# Altium PCB PCB1-B-EVT2.PcbDoc (part 4 of 5)
Units mil, origin at the board's own origin, x right, y up, seen from the top; angles counter-clockwise.
Board outline 3000.03 x 3779.56 mil, 2 copper layers (Top Layer, Bottom Layer); 115 components, 91 nets, 486 pads, 285 vias.
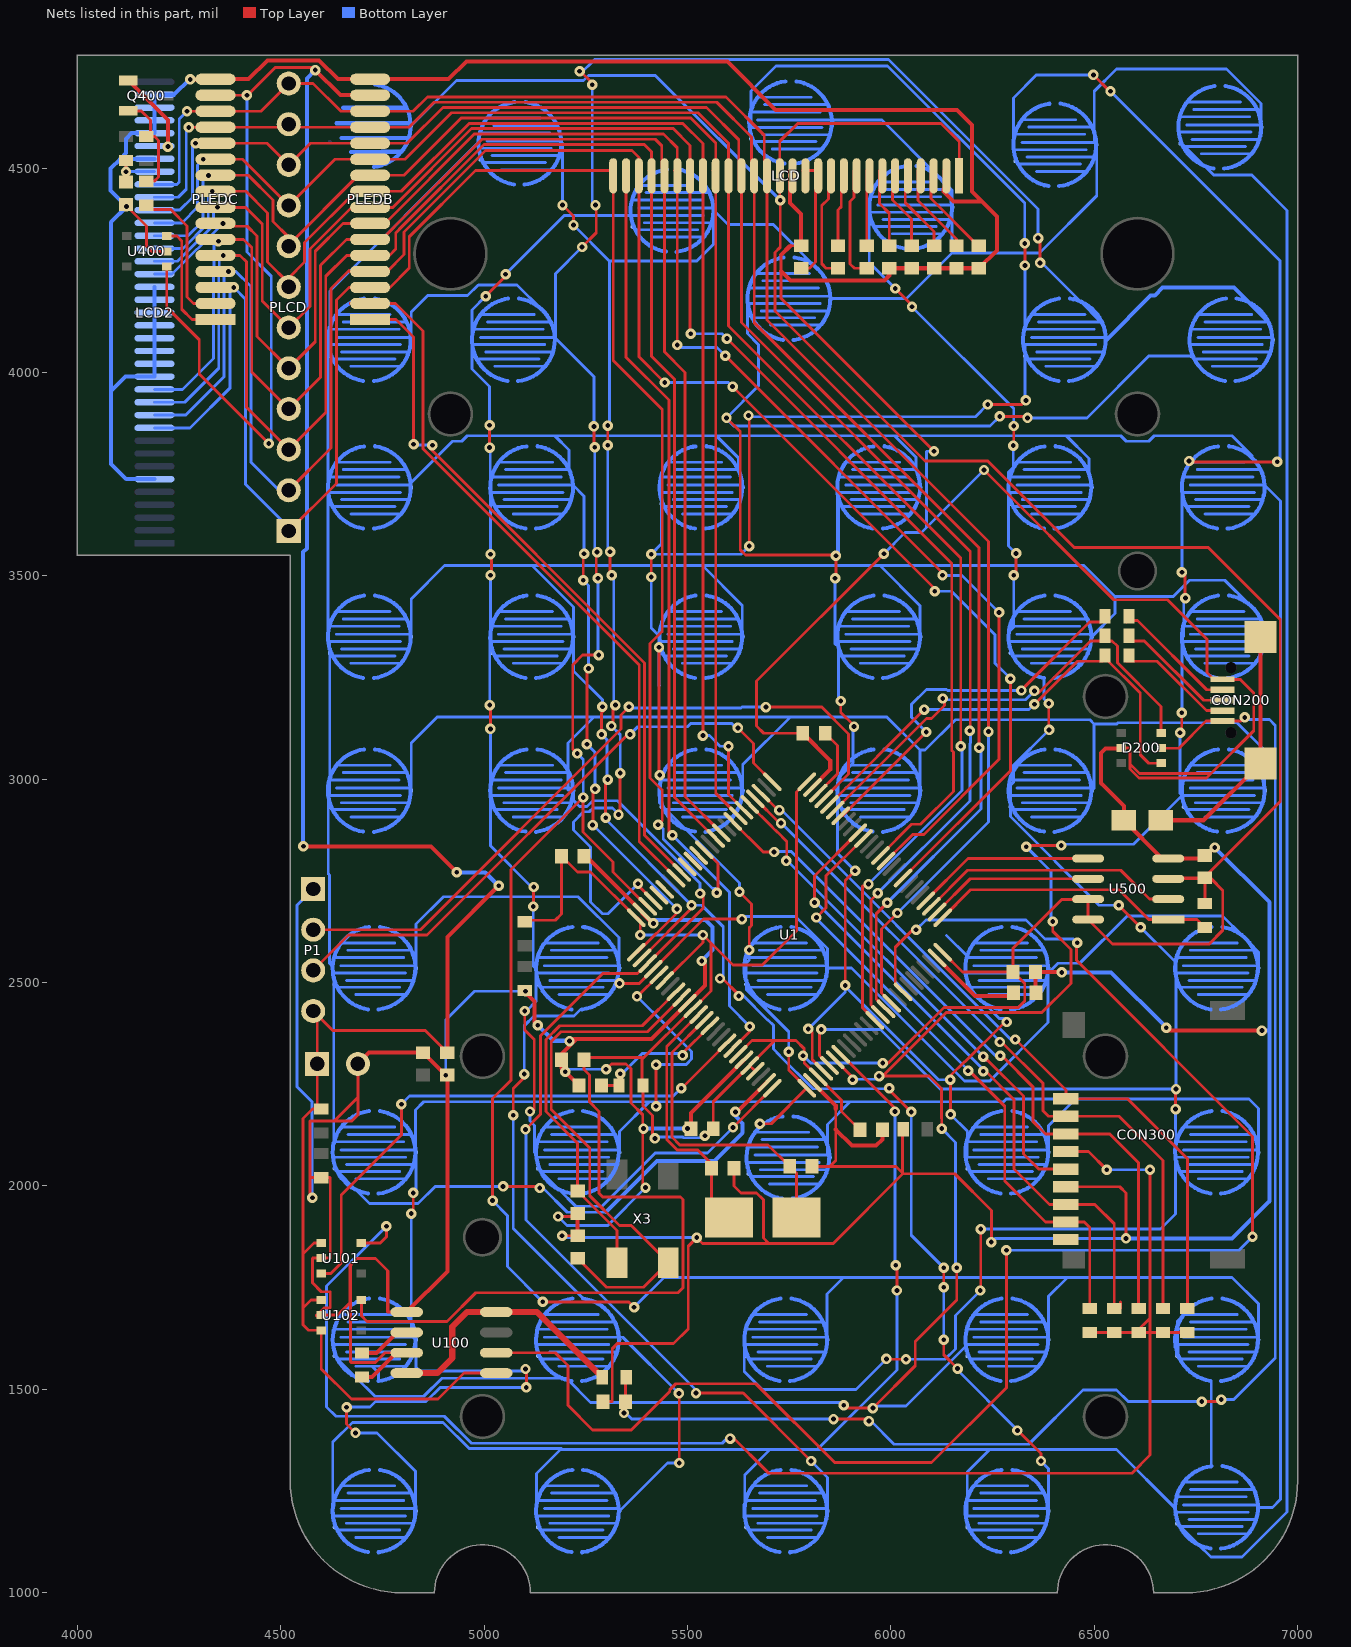
[diagram p4: the nets of this part, all layers, seen from the top]

## Via types
v1: diameter 25.59, hole 11.81, Top Layer to Bottom Layer, 281 vias
v2: diameter 25.59, hole 11.81, Top Layer to Bottom Layer, tented both sides, 2 vias
v3: diameter 39.37, hole 39.37, Top Layer to Bottom Layer, tented both sides, 2 vias

## Nets (pads, with @x,y where several pads share a name; then routed paths per layer and width w, separated by ;. In a path a pad name is that pad's centre, name@x,y a point inside that pad or via, vN(x,y) a via of type N, cw(c..) or ccw(c..) an arc to the next point about the centre after c; other vN are vias at no path point) (continued)
FSMC_A16: LCD2.11 LCD.26 PLCD.2 PLEDB.4 PLEDC.4 U1.58 | length 4991.1
  Top Layer w7: PLCD.2@4520,3710 4624.03,3814.03 4624.03,4206.03 4668,4250 4669.89,4248.11 PLEDB.4@4720,4248.11 4762.11,4248.11 4803.29,4289.29 4803.29,4344.38 4804.71,4345.81 4804.71,4346.33 5003.38,4545 5364,4545 5380.6,4528.4 LCD.26@5380.6,4483 5380.6,4038.4 v1(5444,3975) ; LCD.26@5374.01,4449.61 LCD.26@5374.01,4496.06 ; v1(5611,3965) 6111,3465 v1(6108,3462) ; U1.58@6030.09,2756.89 6294,3020.8 v1(6294,3247)
  Bottom Layer w7: LCD2.11@4190,3894.96 4266.96,3894.96 4361,3989 v1@4361,4245 ; v1(4372,4248.11) 4389.89,4248.11 4427,4211 4427,3779 4496,3710 PLCD.2@4520,3710 ; v1(5444,3975) 5601,3975 v1(5611,3965) ; v1(6108,3462) 6149,3462 6256,3355 6256,3285 v1(6294,3247)
FSMC_D0: LCD2.22 LCD.23 PLCD.5 PLEDB.7 PLEDC.7 U1.61 | length 4329.5
  Top Layer w7: v1(4358,4366) 4357.78,4366.22 PLEDC.7@4340,4366.22 4347.22,4359 4417.97,4359 4441.97,4335 4441.97,4088.03 PLCD.5@4520,4010 4585.03,4075.03 4585.03,4297.82 4653.42,4366.22 PLEDB.7@4720,4366.22 4756.22,4366.22 4976,4586 5441,4586 5475.09,4551.91 5475.09,4502.65 LCD.23@5468.5,4496.06 ; v1(5475.09,4067.09) LCD.23@5475.09,4483 ; v1(5593,4041) v1@6127,3507 ; U1.61@5988.33,2798.65 6054,2864.32 6081.32,2864.32 6266,3049 v1(6266,3410) ; v1(6127,3501) 6127,3500 v1@6129,3498
  Bottom Layer w7: LCD2.22@4190,4241.42 4233.42,4241.42 v1(4358,4366) ; v1(5475.09,4067.09) 5481.17,4061 5573,4061 v1(5593,4041) ; v1(6127,3501) 6175,3501 v1(6266,3410)
FSMC_D1: LCD2.23 LCD.22 PLCD.6 PLEDB.8 PLEDC.8 U1.62 | length 4073.4
  Top Layer w7: v1(4345,4406) 4340.41,4406 PLEDC.8@4340,4405.59 4414.38,4405.59 4454.97,4365 4454.97,4175.03 PLCD.6@4520,4110 4572.03,4162.03 4572.03,4303.21 4674.41,4405.59 PLEDB.8@4720,4405.59 4775.59,4405.59 4969,4599 5465,4599 5506.58,4557.42 5506.58,4502.65 LCD.22@5500,4496.06 ; LCD.22@5506.58,4483 5506.58,4096.42 v1(5508,4095) ; v1(5597,4083) 6149.7,3530.3 6149.7,3070.47 6153.81,3066.37 6153.81,2969.81 6073,2889 6050.84,2889 U1.62@5974.41,2812.57
  Bottom Layer w7: LCD2.23@4190,4272.91 4246.53,4272.91 4335,4361.38 4335,4396 v1(4345,4406) ; v1(5508,4095) 5585,4095 v1(5597,4083)
FSMC_D2: LCD2.24 LCD.21 PLCD.7 PLEDB.9 PLEDC.9 U1.81 | length 3530.6
  Top Layer w7: v1(4332,4445) v1(4332,4445) PLEDC.9@4340,4444.96 4415.04,4444.96 4467.97,4392.03 4467.97,4270.97 PLCD.7@4520,4218.94 ; PLCD.7@4520,4210 PLCD.7@4520,4218.94 ; LCD.21@5531.5,4496.06 5538.08,4502.65 5538.08,4562.54 5488.62,4612 4963.62,4612 4796.58,4444.96 PLEDB.9@4720,4444.96 4685.04,4444.96 4559.03,4318.95 4559.03,4270.97 4520,4231.94 PLCD.7@4520,4218.94 ; v1(5538,3107) LCD.21@5538.08,4483 ; v1(5601,3081) 5601,2961.87 U1.81@5638.95,2923.92
  Bottom Layer w7: LCD2.24@4190,4304.41 4259.64,4304.41 4322,4366.77 4322,4435 v1(4332,4445) ; v1(5538,3107) 5554.16,3107 5580.16,3081 v1(5601,3081)
FSMC_D3: LCD2.25 LCD.20 PLCD.8 PLEDB.10 PLEDC.10 U1.82 | length 3435
  Top Layer w7: v1(4323,4484) 4323.33,4484.33 PLEDC.10@4340,4484.33 4420.33,4484.33 4480.97,4423.69 4480.97,4370.97 4520,4331.94 PLCD.8@4520,4313.32 ; PLCD.8@4520,4310 PLCD.8@4520,4313.32 ; LCD.20@5562.99,4496.06 5569.57,4502.65 5569.57,4563.43 5508,4625 4944,4625 4803.33,4484.33 PLEDB.10@4720,4484.33 4691.01,4484.33 PLCD.8@4520,4313.32 ; LCD.20@5569.57,4483 5569.57,2965.46 U1.82@5625.03,2910
  Bottom Layer w7: LCD2.25@4190,4335.91 4272.75,4335.91 4309,4372.15 4309,4470 v1(4323,4484)
FSMC_D4: LCD2.26 LCD.19 PLCD.9 PLEDB.11 PLEDC.11 U1.38 | length 4222.7
  Top Layer w7: v1(4310,4524) 4310.3,4523.7 PLEDC.11@4340,4523.7 4406.3,4523.7 PLCD.9@4520,4410 4633.7,4523.7 PLEDB.11@4720,4523.7 4805.7,4523.7 4920,4638 5526,4638 5601.07,4562.93 LCD.19@5601.07,4483 5601.07,4113.93 6171.7,3543.3 6171.7,3109.77 6172,3109.47 v1(6172,3081) ; v1(5945,2742) 5940,2737 5930,2737 5930,2438 U1.38@5960.49,2407.51
  Bottom Layer w7: LCD2.26@4190,4367.4 4257.4,4367.4 4296,4406 4296,4510 v1(4310,4524) ; v1(5945,2742) 6175,2972 6175,3078 v1(6172,3081)
FSMC_D5: LCD2.27 LCD.18 PLCD.10 PLEDB.12 PLEDC.12 U1.39 | length 4222.7
  Top Layer w7: v1(4291,4563) 4291.07,4563.07 PLEDC.12@4340,4563.07 4466.93,4563.07 PLCD.10@4520,4510 4573.07,4563.07 PLEDB.12@4720,4563.07 4811.07,4563.07 4899,4651 5546.5,4651 5625.98,4571.52 LCD.18@5625.98,4451 ; LCD.18@5632.57,4483 5632.57,4122.43 6195,3560 6195,3120 v1(6194,3119) ; v1(5968,2720) 5951,2703 5951,2444.84 U1.39@5974.41,2421.43
  Bottom Layer w7: LCD2.27@4190,4398.9 4251.9,4398.9 4283,4430 4283,4563 v1(4291,4563) ; v1(5968,2720) 6194.7,2946.7 6194.7,3087.53 6196,3088.83 6196,3117 v1(6194,3119)
FSMC_D6: LCD2.28 LCD.17 PLCD.11 PLEDB.13 PLEDC.13 U1.40 | length 4173.1
  Top Layer w7: v1(4274,4602) 4274.44,4602.44 PLEDC.13@4340,4602.44 4512.44,4602.44 PLCD.11@4520,4610 4527.56,4602.44 PLEDB.13@4720,4602.44 4815.44,4602.44 4877,4664 5572,4664 5657.48,4578.52 LCD.17@5657.48,4496.06 ; LCD.17@5664.06,4483 5664.06,4121.94 6217,3569 v1(6217,3077) ; U1.40@5988.33,2435.35 5964,2459.68 5964,2669 v1(5991,2696)
  Bottom Layer w7: LCD2.28@4190,4430.39 4248.39,4430.39 4268,4450 4268,4602 v1(4274,4602) ; v1(5991,2696) 6222,2927 6222,3072 v1(6217,3077)
FSMC_D7: LCD2.29 LCD.16 PLCD.12 PLEDB.14 PLEDC.14 U1.41 | length 4239.8
  Top Layer w7: v1(4269.81,4641.81) PLEDC.14@4340,4641.81 4451.81,4641.81 PLCD.12@4520,4710 4580,4710 4648.19,4641.81 PLEDB.14@4720,4641.81 4825.81,4641.81 4861,4677 5594.9,4677 5688.98,4582.92 LCD.16@5688.98,4496.06 ; LCD.16@5695.56,4483 5695.56,4128.44 6240,3584 v1(6240,3117) ; U1.41@6002.25,2449.27 5977,2474.52 5977,2632 v1(6016,2671)
  Bottom Layer w7: LCD2.29@4190,4461.89 4244.89,4461.89 4251,4468 4251,4623 v1(4269.81,4641.81) ; v1(6016,2671) 6240,2895 v1(6240,3117)
FSMC_NE1: LCD2.10 LCD.28 PLCD.1 PLEDB.3 PLEDC.3 U1.88 | length 4658.9
  Top Layer w7: PLCD.1@4520,3610 4637.03,3727.03 4637.03,4177.99 4667.77,4208.74 PLEDB.3@4720,4208.74 4768.74,4208.74 4816.29,4256.29 4816.29,4333.19 4979.16,4496.06 5311.02,4496.06 LCD.28@5311.02,4463 ; LCD.28@5317.6,4483 5317.6,4029.4 5438,3909 5438,3363 5437.47,3363 5407.7,3333.24 5407.7,3002.77 5437.47,2973 5438,2973 5438,2898 v1(5428,2888) ; U1.88@5541.51,2826.49 5575,2793 5575,2721 v1(5572,2721)
  Bottom Layer w7: LCD2.10@4190,3863.46 4277.46,3863.46 4376,3962 v1@4376,4209 ; v1(4385,4208.74) 4414,4179.74 4414,3724.94 4520,3618.94 PLCD.1@4520,3610 ; v1(5428,2888) 5429,2889 5440.7,2877.3 5440.7,2852.77 5561.85,2731.62 5569.38,2731.62 5572,2729 v1(5572,2721)
FSMC_NOE: LCD2.13 LCD.24 PLCD.4 PLEDB.6 PLEDC.6 U1.85 | length 4116.8
  Top Layer w7: PLEDC.6@4340,4326.85 4409.12,4326.85 4428.97,4307 4428.97,4001.03 PLCD.4@4520,3910 4598.03,3988.03 4598.03,4263.03 4661.85,4326.85 PLEDB.6@4720,4326.85 4748.99,4326.85 4770,4347.86 4778.71,4356.58 4778.71,4357.1 4994.62,4573 5421,4573 5437.01,4556.99 LCD.24@5437.01,4496.06 ; LCD.24@5443.59,4483 5443.59,4050.41 5494,4000 5494,2957.52 U1.85@5583.27,2868.25
  Bottom Layer w7: LCD2.13@4190,3957.95 4258.95,3957.95 4335,4034 4335,4255.77 4336,4256.77 4336,4320.05 4364.74,4320.05
  other v1: 4347,4322
FSMC_NWE: LCD2.12 LCD.25 PLCD.3 PLEDB.5 PLEDC.5 U1.86 | length 4235.8
  Top Layer w7: PLEDC.5@4340,4287.48 v1(4359,4287.48) 4400.49,4287.48 4415.97,4272 4415.97,3914.03 PLCD.3@4520,3810 4611.03,3901.03 4611.03,4235.99 4662.52,4287.48 PLEDB.5@4720,4287.48 4767.48,4287.48 4783,4303 4783,4342.48 4791.71,4351.19 4791.71,4351.71 5000,4560 5394,4560 5412.09,4541.91 5412.09,4502.65 LCD.25@5405.51,4496.06 ; PLEDB.5@4740.26,4293.25 PLEDB.5@4741.71,4293.25 ; LCD.25@5412.09,4483 5412.09,4038.91 5468,3983 5468,2955.68 U1.86@5569.35,2854.33
  Bottom Layer w7: LCD2.12@4190,3926.46 4264.46,3926.46 4348,4010 4348,4250.38 4349,4251.38 4349,4277.48 v1(4359,4287.48)
GND: BAT.2 C8.2 C9.2 C10.2 C11.2 C12.2 C13.2 C14.1 C15.2 C16.2 C17.2 C18.2 C19.2 C100.1 C101.1 C102.1 C400.1 C401.1 C402.1 C403.1 C404.1 C407.1 C410.1 C500.2 CON200.5 CON300.6 D200.2 L200.2 LCD2.6 LCD2.14 LCD2.15 LCD2.16 LCD2.17 LCD2.18 LCD2.19 LCD2.20 LCD2.21 LCD2.31 LCD2.33 LCD2.34 LCD2.35 LCD2.36 LCD.2 LCD.14 P1.1 PLEDB.16 PLEDC.16 R7.1 R12.2 R103.1 R104.1 U1.10 U1.20 U1.27 U1.74 U1.99 U100.1 U100.3 U101.2 U102.2 U400.2 U500.4 | length 21699.5
  Top Layer w7: C410.1@4120,4412.44 4120,4410 4170,4360 4170,4310 4182.6,4297.4 U400.2@4220,4297.4 ; v1(4578,1971) 4572,1977 4572,2021.47 ; U102.2@4589,1682 4607,1700 4621,1700 4622,1701 4622,1739 4621,1740 4600,1740 4578,1762 4578,1821.6 4579,1822.6 U101.2@4600,1822.6 4621,1822.6 4622,1823.6 4622,2019.47 4621,2020.47 R104.1@4600,2020.47 4573,2020.47 4572,2021.47 ; U102.2@4600,1682.6 4640.1,1682.6 4670,1712.5 4670,1804.5 4687.5,1822 4733,1822 4762.5,1792.5 ; 4673,1805 4672,1804 4672,1567 4673,1566 4732.51,1566 4756.51,1590 4784,1590 U100.3@4810,1590 ; BAT.2@4690,2300 4690,2218 ; U100.1@4810,1690 4765,1690 ; R7.1@5100,2480.47 v1(5102,2478.47) ; v1(5182,1925) 5212.56,1925 C17.2@5230,1942.44 ; v1(5192,1877.56) C18.2@5230,1877.56 ; C100.1@5292.44,1470 5314,1470 5315,1471 5315,1600 5327.5,1612.5 5466,1612.5 5502,1648.5 5502,1852 v1(5523,1873) 5537,1859 5700,1859 ; v1(5300,2287) 5313,2300 5349,2300 5361,2288 5361,2204 5390,2175 5390,2003 v1(5397,1996) ; C15.2@5614.56,2044 5614.56,2000 5631.56,1983 5670,1983 5687,1966 5687,1872 5700,1859 ; LCD.14@5751.97,4496.06 5758.55,4496.06 LCD.14@5758.55,4483 ; C407.1@5779.53,4311.02 5753,4311.02 5750,4311.02 5730,4291.02 5730,4288.02 5730,4249 5730,4182 v1(6106,3806) ; C13.2@5783.44,3113 5687.5,3113 5670,3130.5 5670,3241 v1(5983,3554) ; C16.2@5806.56,2048 5850,2048 ; 5864.5,2189.83 5864.5,2138.5 5864.5,2062.5 5850,2048 ; R12.2@6029.47,2138 6029,2137.53 6029,2031.5 ; LCD.2@6129.92,4496.06 6129.92,4450 6136.5,4450 LCD.2@6136.5,4483 ; v1(6229,3760) 6548,3441 6680,3441 6777,3344 6777,3262.5 6794.5,3245 6859,3245 6860,3244 ; v1(6247,1862) 6247,1940 6157,2030 6030.5,2030 6029,2031.5 ; CON300.6@6430.18,1998.05 6562.5,1998.05 6578,1982.55 v1(6578,1871) ; D200.2@6555.4,3075 6557.4,3077 6564,3077 6564,3076.6 D200.2@6566,3076.6 6587,3076.6 6588,3075.6 6588,3037.5 ; CON200.5@6814.68,3245.18 6859,3245.18 6860,3244.18 6860,3244 ; 4572,2021.47 4572,2158 ; 4572,2158 4572,2159 4573,2160 4632,2160 ; 4572,2158 4573,2159 4631,2159 4632,2160 ; 4632,2160 4675,2160 4690,2175 4690,2218 ; 4632,2160 4690,2218 ; 4762.5,1792.5 4762.5,1690 4765,1690 ; 4762.5,1792.5 4764,1791 4764,1691 4765,1690 ; 5700,1859 5858.5,1859 6029,2029.5 6029,2031.5 ; 5850,2048 6012.5,2048 6029,2031.5 ; 6588,3037.5 6611.5,3014 6787,3014 ; 6588,3037.5 6588,3025 6610,3003 6776,3003 6787,3014 ; 6787,3014 6892,3119 6892,3212 6860,3244
  Top Layer w10: v1(4278,4720) 4339.45,4720 PLEDC.16@4340,4720.55 4421.55,4720.55 4467.8,4766.8 4594.86,4766.8 4641.1,4720.55 PLEDB.16@4720,4720.55 4913,4720.55 4956.45,4764 5598,4764 5717,4645 6162.5,4645 6200,4607.5 6200,4444 6224,4420 ; U102.2@4589,1682 4596.9,1682 U102.2@4600,1682.6 ; BAT.2@4690,2300 4717.56,2327.56 C102.1@4850,2327.56 4905.12,2272.44 C101.1@4910,2272.44 4910,1790 U100.1@4810,1690 ; R103.1@4700,1530.47 4724.47,1530.47 U100.3@4784,1590 ; R7.1@5100,2480.47 5100,2477.59 5123.8,2453.8 5123.8,2403.2 v1(5132,2395) ; v1(5210,2356) 5215,2361 5227,2361 ; C18.2@5230,1877.56 C17.2@5230,1932.44 C17.2@5230,1942.44 ; C14.1@5233.44,2247 v1(5199.72,2280.72) 5190.44,2290 C19.2@5190.44,2310 5190.44,2324.44 5227,2361 ; C10.2@5245.56,2811 5250.77,2811 U1.99@5388.4,2673.37 5388.4,2671.57 5414.48,2645.48 v1(5416.29,2645.48) ; v1(5500,2141) C11.2@5508.44,2141 5508.44,2179.57 U1.20@5638.95,2310.08 ; v1(5535,2553) 5543.2,2544.8 5543.2,2492.72 U1.10@5499.75,2449.27 5411.48,2361 5227,2361 ; 5730,4249 5753,4226 5984.56,4226 5996.06,4237.5 C404.1@5996.06,4255.91 C403.1@6051.18,4255.91 C402.1@6106.3,4255.91 C401.1@6161.42,4255.91 C400.1@6216.54,4255.91 6260.63,4300 6260.63,4383.37 6224,4420 ; 5730,4288.02 5753,4311.02 ; LCD.14@5751.97,4496.06 5751.97,4416.56 5779.53,4389 C407.1@5779.53,4311.02 ; C13.2@5783.44,3113 5851,3045.44 5851,3023.23 U1.74@5807.37,2979.6 ; U1.27@5807.37,2254.4 5807.6,2254.4 5864.5,2197.5 5864.5,2189.83 ; 5864.5,2138.5 5904,2099 5964,2099 5979.56,2114.56 C8.2@5979.56,2138 ; R12.2@6029.47,2138 R12.2@6030.47,2139 ; LCD.2@6129.92,4450 6129.92,4444 6153.92,4420 6224,4420 ; C12.2@6355.56,2467 C9.2@6355.56,2526 6421,2526 v1(6420,2525) ; D200.2@6555.4,3075 6528,3075 6517,3064 6517,2990 6573,2934 L200.2@6573,2899 6667,2805 U500.4@6681.85,2805 6764.29,2805 C500.2@6771.85,2812.56 6776.56,2812.56 v1(6796,2832) ; v1(6677,2389) 6684,2382 v1(6912,2382)
  Bottom Layer w7: v1(4578,1971) 4577,1972 4577,2207 4540,2244 4540,2690 P1.1@4580,2730 ; v1(4906,2272) 4906,2408 4976.47,2478.47 v1(5102,2478.47) ; v1(5182,1925) 5204,1903 5304,1903 v1(5397,1996) ; v1(5192,1877.56) 5196.56,1873 v1(5523,1873) ; v1@5198.5,2279.5 v1(5199.72,2280.72) 5206,2287 v1(5300,2287) ; v1(5983,3554) 6035,3606 6075,3606 6088,3619 ; v1(6106,3806) 6089,3806 6088,3805 6088,3619 ; v1(6229,3760) 6088,3619 ; v1(6247,1862) 6256,1871 v1(6578,1871)
  Bottom Layer w10: LCD2.6@4190,3737.48 4120.52,3737.48 4083,3775 4083,3954 ; LCD2.21@4190,4209.92 LCD2.20@4190,4178.43 LCD2.19@4190,4146.93 LCD2.18@4190,4115.43 LCD2.17@4190,4083.94 LCD2.16@4190,4052.44 LCD2.15@4190,4020.95 LCD2.14@4190,3989.45 4118.45,3989.45 4083,3954 ; LCD2.31@4190,4524.88 4105.88,4524.88 ; v1(4278,4720) 4277,4721 4238.36,4682.36 LCD2.36@4190,4682.36 LCD2.35@4190,4650.87 LCD2.34@4190,4619.37 LCD2.33@4190,4587.88 4133.88,4587.88 4120,4574 4120,4539 4105.88,4524.88 ; v1(5132,2395) 5133,2395 5171,2357 5209,2357 v1(5210,2356) ; v1(5392,2141) v1(5500,2141) ; v1(5416.29,2645.48) 5415.52,2645.48 5407,2654 5544,2654 5561.8,2636.2 5561.8,2579.8 v1(5535,2553) ; v1(6420,2525) 6541,2525 v1(6677,2389) ; v1(6578,1871) 6839,1871 6930.5,1962.5 6930.5,2381 ; v1(6796,2832) 6930.5,2697.5 6930.5,2381 ; v1(6912,2382) 6929.5,2382 6930.5,2381 ; 4083,3954 4083,4369 4121,4407 v1(4121,4408) 4082,4447 4082,4501 4105.88,4524.88
I2C1_SCL: U1.95
I2C1_SDA: U1.96
KI_0: KEY1.2 KEY8.2 KEY15.2 KEY22.2 KEY29.2 KEY36.2 KEY43.2 U1.24 | length 4067.3
  Top Layer w7: v1(5047,1999) 5137,1999 5139,1997 v1(5137,1995)
  Top Layer w10: v1(5618,2182) 5619.23,2180.77 5621,2180.77 U1.24@5694.63,2254.4
  Bottom Layer w7: 4616.57,4087.01 4616.57,4072.25 4616.57,3724.48 4616.57,3709.25 4616.57,3357.48 4616.57,3342.25 4620.81,3338 4620.81,3319.81 4620.81,3310 4620.81,3001.92 4620.81,2963.32 4617.03,2959.54 4617.03,2932 4617.03,2767.58 4620.53,2764.08 4620.53,2546.53 4628.06,2539 ; 4616.54,4087.04 4621,4091.5 4621,4110.53 4621,4200.09 4986.34,4565.43 4986.49,4565.58 4986.49,4568.97 ; 4630.53,2105.21 4630.53,2495.4 4630.53,2512.62 ; KEY43.2@4632.51,2043.89 4633.2,2043.2 4633.7,2042.7 KEY43.2@4632.7,2042.7 4639.03,2036.37 4683.96,1991.44 4718.4,1957 4838,1957 4880,1999 v1(5047,1999) ; 5008.02,4624.99 5139.02,4624.99 ; v1(5137,1995) 5145.05,1995 5204.55,1935.5 5299.5,1935.5
  Bottom Layer w10: 5299.5,1935.5 5425,2061 5566,2061 5635.8,2130.8 5635.8,2153.86 5618,2171.65 v1(5618,2182) v1@5616.35,2182
KI_1: KEY2.2 KEY9.2 KEY16.2 KEY23.2 KEY30.2 KEY37.2 KEY44.2 U1.25 | length 3384
  Top Layer w7: v1(5004,4187) 5053,4236 v1(5053,4241) ; v1(5013.82,3815) v1(5013.82,3869.82) ; v1(5014,3182) 5015.57,3180.43 v1(5015.57,3123.57) ; v1(5016,3501) 5018,3501 5018,3553 v1(5016,3553) ; v1(5100,2430) 5100,2383.53 5123.3,2360.24 5123.3,2187.3 5119,2183 v1(5113,2183) ; v1(5121,2687) 5122,2688 v1(5122,2735) ; v1(5612,2144) 5612.07,2144 U1.25@5708.55,2240.48
  Bottom Layer w7: v1(5004,4187) 4970.6,4153.6 4970.6,4082.75 4970.6,4076.98 4970.6,4040 4970.6,4008.4 5013.82,3965.18 v1(5013.82,3869.82) ; v1(5013.82,3815) 5015.41,3816.59 5015.41,3815 5015.41,3721.88 ; v1(5014,3182) 5014,3310 5014,3359.91 5016,3361.91 v1(5016,3501) ; 5015.57,2964.24 5015.57,2932 5015.57,2836.43 5117,2735 v1(5122,2735) ; 5015.57,2979.49 v1(5015.57,3123.57) ; v1(5016,3553) 5016,3677 5016,3704.82 ; KEY16.2@5019.81,3678.19 5020.5,3677.5 5021,3677 KEY16.2@5020,3677 ; v1(5053,4241) 5197.18,4385.18 5361.07,4385.18 ; v1(5100,2430) 5104,2430 5128,2454 5128,2495.4 5128,2533.67 5121,2540.67 v1(5121,2687) ; v1(5113,2183) 5113,2159.53 5124.3,2148.24 5124.3,2082.72 5128.05,2078.97 ; KEY44.2@5132.7,2042.7 5139.03,2036.37 5183.96,1991.44 5225.4,1950 5290,1950 5421,2081 5549,2081 v1(5612,2144)
KI_2: KEY3.2 KEY10.2 KEY17.2 KEY24.2 KEY31.2 KEY38.2 KEY45.2 U1.26 | length 4537.2
  Top Layer w7: v1(5411,3497) v1(5411,3553) ; v1(5430,3324) 5430,3012 v1(5432,3010) ; v1(5628,2723) 5657.8,2693.2 5657.8,2640.35 5652,2634.55 v1(5652,2580) ; v1(5650,3894) 5652,3896 v1(5652,3573) ; v1(5678,2153) 5705.97,2153 U1.26@5793.45,2240.48 5749,2284.93 v1(5749,2330) ; v1(6238,3921) 6322,3921 v1(6332,3931) ; v1(6329,4317) 6329.61,4316.39 v1(6329.61,4262.61)
  Bottom Layer w7: v1(5411,3497) 5411,3371.25 5431.29,3350.95 5431.29,3348.72 5431.29,3310 KEY24.2@5436,3310 ; v1(5430,3324) 5430,3229 5431.29,3230.29 ; 5431.31,2974 5431.31,2969.73 5431.31,2941.06 5438.69,2933.68 5447.37,2925 5495.27,2877.11 5628,2744.37 v1(5628,2723) ; 5435.81,3705 5435.81,3686.81 5435.81,3577.81 v1(5411,3553) 5632,3553 v1(5652,3573) ; v1(5650,3894) 5647,3891 6208,3891 v1(6238,3921) ; v1(5652,2580) 5652,2561.4 5652,2555.53 5644.5,2548.03 5644.5,2523.4 5644.5,2504.59 KEY38.2@5644.5,2495.4 5644.5,2483.5 5749,2379 v1(5749,2330) ; 5656.19,4602.17 5656.19,4644.09 5656.19,4691.19 5718,4753 5992,4753 6329,4416 v1(6329,4317) ; 6329.41,4068 6329.41,4049.81 6329.41,3933.59 v1(6332,3931) ; KEY10.2@6329.61,4040 6329.61,4049.2 ; 6329.61,4110.53 v1(6329.61,4262.61)
KI_3: KEY4.2 KEY11.2 KEY18.2 KEY25.2 KEY32.2 KEY39.2 KEY46.2 U1.29 | length 4713
  Top Layer w7: v1(5596,3888) 5629.7,3854.3 5629.7,3563.76 5642.77,3550.7 5863.3,3550.7 v1(5865,3549) 5865,3496 v1(5863,3494) ; v1(5797,2386) 5798,2386 5806.7,2377.3 5806.7,2310.75 U1.29@5835.21,2282.24 ; v1(5877,3192) 5877,3164 5909.33,3131.67 v1(5909.33,3129.2) ; v1(5888,2493) 5888,2751 v1(5912,2775) ; v1(6147,2176) 6147,2271.53 6180.77,2305.3 6182.3,2305.3 v1@6278,2401 ; v1(6267.8,3891.8) 6332.2,3891.8 v1(6336,3888)
  Bottom Layer w7: 5647.9,4175.08 5647.9,4095.1 5675,4068 5675,3967 v1(5596,3888) 5595,3887 5614,3868 6244,3868 v1(6267.8,3891.8) ; v1(5797,2386) 5888,2477 v1@5888,2490 ; v1(5863,3494) 5863,3333 5871.48,3324.52 5871.48,3197.52 v1(5877,3192) ; 5869,2959.82 5869,2818 v1(5912,2775) ; 5869.59,3700.59 5874,3705 ; 5874,3005.55 5890,3021.55 5890,3022.63 5901.37,3034 5906.8,3039.42 5906.8,3051.77 5906.8,3129.2 v1(5909.33,3129.2) ; v1(5888,2493) v1@5888,2490 ; 5888.5,3670 6033,3670 ; 6137.03,2616 6187.71,2565.32 ; v1(6146,2261) 6117,2261 v1@5888,2490 ; v1(6147,2176) 6187.9,2135.1 6187.9,2113.23 6187.9,2071.7 6188.9,2070.7 ; 6201.12,2477.45 6227.54,2451.03 6266.57,2412 v1@6278,2412 ; v1(6336,3888) 6482,3888 6634,4040 KEY11.2@6739.06,4040
  Bottom Layer w10: v1(5865,3549) 5869.59,3553.59 5869.59,3700.59
  other v1: 6285,2403
KI_4: KEY5.2 KEY12.2 KEY19.2 KEY26.2 KEY33.2 KEY40.2 KEY47.2 U1.30 | length 5276.4
  Top Layer w7: v1(5829,2385) 5825,2381 5825,2320.29 U1.30@5849.13,2296.16 ; v1(5989,1575) 5988,1574 v1(6037.3,1574) ; v1(6011,4206) 6052,4165 v1(6052,4161) ; v1(6220,1743) 6221,1744 v1(6221,1894) ; v1(6301,3820) 6302,3821 v1(6302,3868) ; v1(6302,3501) 6308,3507 v1(6308,3555) ; v1(6388,3186) 6388,3121 v1(6389,3121) ; v1(6560,2690) v1(6614,2636) ; v1(6700,2189) 6700,2232 6701,2233 v1(6701,2238)
  Bottom Layer w7: 5639.8,1620.15 5639.8,1544.2 5684,1500 5914,1500 v1(5989,1575) ; v1(5829,2385) 5974.62,2385 6121.31,2238.31 6700.6,2238.31 v1@6700.65,2238.35 ; 5947,4401.91 5947,4270 v1(6011,4206) ; v1(6037.3,1574) 6133.32,1574 6159,1599.68 6159,1682 v1(6220,1743) ; v1(6052,4161) 6302,3911 v1(6302,3868) ; v1(6221,1894) 6663,1894 6700,1931 6700,2067.53 6700,2075.12 ; 6290,3361.91 6302,3373.91 6302,3376 6302,3399.22 v1(6302,3501) ; v1(6301,3820) 6301,3766 6289.57,3754.57 6289.57,3724.48 6289.57,3709.25 6289.57,3573.43 v1(6308,3555) ; 6375.98,3248.88 6376.8,3248.07 6376.8,3197.2 v1(6388,3186) ; v1(6389,3121) 6301.07,3033.07 6301.07,3019.49 6301.07,2998 6301.07,2991.7 6294,2984.63 6294,2960 6294,2941.19 KEY33.2@6294,2932 6294,2908 6512,2690 v1(6560,2690) ; v1(6614,2636) 6695.85,2554.15 6700.65,2554.15 6700.65,2516.38 v1@6700.65,2238.35 ; 6699.22,2074.34 6700,2075.12 ; v1(6700,2189) 6700,2097.6 6700,2075.12 ; v1(6701,2238) v1@6700.65,2238.35
KI_5: KEY6.2 KEY13.2 KEY20.2 KEY27.2 KEY34.2 KEY41.2 KEY48.2 U1.31 | length 6762.5
  Top Layer w7: U1.31@5863.05,2310.08 5911.83,2261.3 v1(5906.02,2261.3) ; v1(5884,1461) 5891,1454 v1(5956,1454) 6060,1558 6060,1618 6162,1720 v1(6162,1799) ; v1(5971,2270) v1@5980,2270 ; v1(6125,2141) 6125,2166.17 6124.7,2166.47 6124.7,2239.3 6094,2270 v1@5980,2270 ; v1(6333,2834) 6336,2837 v1(6419,2837) ; v1(6398,2650) 6398,2626 6443,2581 6443,2498 6371,2426 6136,2426 v1@5980,2270 ; v1(6498,4731) 6538,4691 v1(6540,4691) ; v1(6711,3114) 6715,3118 v1(6715,3163) ; v1(6715.57,3508.43) 6723,3501 6723,3446 v1(6724,3445) ; v1(6733,3782) 6735,3780 v1(6950,3780)
  Bottom Layer w7: KEY48.2@4632.7,1582 4639.03,1575.67 4639.7,1575 ; 4640.7,1575 4639.7,1575 ; KEY41.2@5135.59,1583.18 5143.78,1575 ; v1(5884,1461) 5877,1468 5488.53,1468 5488.23,1467.7 5469.77,1467.7 5469.47,1468 5262,1468 5202.69,1527.31 5191.47,1527.31 4896.31,1527.31 4852,1483 4731.7,1483 4683.96,1530.74 4639.7,1575 ; v1(5906.02,2261.3) 5907.02,2262.3 5963.3,2262.3 v1(5971,2270) v1@5980,2270 ; v1(5956,1454) 5961.19,1459.19 6036.89,1459.19 6184.33,1606.62 6187.71,1610 ; v1(6125,2141) 6159,2107 6159,1802 v1(6162,1799) ; 6301.27,4558.28 6301.27,4559.57 6301.27,4674.73 6357.55,4731 v1(6498,4731) ; v1(6333,2834) 6394,2773 v1@6394,2650 ; v1(6419,2837) 6422,2840 6596.49,2840 6716.03,2959.54 6711,2964.58 v1(6711,3114) ; v1(6540,4691) 6957,4274 6957,3782 6955,3780 v1(6950,3780) ; v1(6715,3163) 6715.31,3163.31 6715.31,3347.69 6720,3352.38 6720,3380.53 6720,3441 v1(6724,3445) ; v1(6715.57,3508.43) 6715.57,3709.24
KI_6: KEY7.2 KEY14.2 KEY21.2 KEY28.2 KEY35.2 KEY42.2 KEY49.2 U1.32 | length 8662.7
  Top Layer w7: U1.32@5876.97,2324 6010,2190.97 v1(6010,2183) ; v1(6012,1805) 6015,1802 v1(6015,1743)
  Bottom Layer w7: 4628.28,1193.17 4628.28,1208.56 4628.28,1370.28 4677,1419 4898.97,1419 4963.51,1354.47 5190.47,1354.47 5188,1352 ; 5128.83,1187.8 5128.83,1213.93 5128.83,1292.83 5188,1352 ; 5640.93,1185.62 5640.93,1216.11 5640.93,1289.93 5703,1352 ; 5820,1353 6015,1548 v1(6015,1743) ; v1(6010,2183) 6010,1805 v1(6012,1805) ; 6188,1189 6187.9,1189.1 6187.9,1231.53 6187.9,1296.9 6243,1352 ; 6209,1154 6347.9,1154 ; 6698.91,1207.91 6554.81,1352 6243,1352 ; 6703.41,1610 6702,1608.59 6702,1596.84 6702,1585 KEY14.2@6704.6,1582.4 ; KEY14.2@6703.6,1582 KEY14.2@6704.6,1582 ; 6704.6,1648 6704.6,1610 6704.6,1588.18 KEY14.2@6704.6,1582.4 ; 6706,1587.5 6706,1610 ; 6706,1648 6706,1659.32 6706,1668 6715.12,1677.12 6722,1684 6753,1684 6759,1684 6851.6,1684 ; KEY14.2@6706.99,1582 KEY14.2@6705,1582 ; 6708.95,1165.65 6711.6,1163 6756.83,1117.77 6786.6,1088 6863,1088 6974,1199 6974,4398 6887.33,4484.67 6793.56,4484.67 6770.76,4507.47 6722.87,4555.36 6715.87,4562.36 6714.88,4562.36 KEY7.2@6711.5,4562.36 ; 6720.6,1684 6718.1,1681.5 6705,1668.4 6705,1656.67 6705,1648 6705,1610 6705,1587.06 KEY14.2@6705,1582 ; 6785.58,1520.88 6787.71,1518.75 6787.71,1311.15 ; 5188,1352 5703,1352 ; 5703,1352 6243,1352 ; KEY14.2@6704.6,1582 6705,1581.6 KEY14.2@6705,1582 ; KEY14.2@6704.6,1582 KEY14.2@6705,1582 ; KEY14.2@6704.6,1582 KEY14.2@6704.6,1582.4 ; KEY14.2@6704.6,1582.4 KEY14.2@6705,1582
KO_0: KEY1.1 KEY2.1 KEY3.1 KEY4.1 KEY5.1 KEY6.1 KEY7.1 U1.97 | length 5512.1
  Top Layer w7: v1(5193,4411) 5220,4384 v1(5220,4362) ; v1(5304,3821) v1(5304,3869) ; v1(5310,3559) 5310,3505 v1(5314,3501) ; v1(5313.17,3130.7) 5316.7,3130.7 5316.7,3180.7 5318,3182 v1(5323,3182) ; v1(5330.59,2912.96) 5334.55,2909 5334.55,3014.55 v1(5335,3015) ; v1(5378.45,2743) 5376.45,2741 U1.97@5416.24,2701.21
  Bottom Layer w7: 5184.02,4532.99 5185.19,4532.99 ; KEY1.1@5191.02,4562.99 5193,4561.02 v1(5193,4411) ; v1(5220,4362) 5308,4274 ; v1(5304,3821) 5304,3565 v1(5310,3559) ; v1(5304,3869) 5308,3873 5308,4274 ; v1(5313.17,3130.7) 5334.88,3109 5335,3109 v1(5335,3015) ; v1(5314,3501) 5319,3496 5319,3182 v1(5323,3182) ; v1(5330.59,2912.96) 5330.59,2914.41 5316,2929 5267.92,2929 5258.62,2919.7 5244.7,2919.7 5220,2895 5220,2875 5262,2833 5262,2698.38 5291.19,2669.19 5304.64,2669.19 v1(5378.45,2743) ; KEY2.1@5563.74,4399.21 KEY2.1@5563.74,4396.34 ; KEY2.1@5565.04,4399 KEY2.1@5565.04,4397.64 ; 5681.44,4151.1 5837.5,4151.1 ; 5685.38,4584.17 5844,4584.17 ; 5704.44,4116.1 5823.44,4116.1 ; 5760.48,4079.72 5760.48,4080 5762.71,4080 ; 5827.38,4549.17 5841.36,4563.16 ; 5828.31,4245.63 5813.38,4260.56 5710.93,4363 5599.68,4363 KEY2.1@5565.04,4397.64 ; 5850.38,4620.17 5854.92,4620.17 5978.13,4620.17 6119.17,4479.14 6121.69,4476.61 6150.37,4447.94 6150.37,4293.37 ; KEY4.1@5852.44,4181.1 6038.1,4181.1 6150.37,4293.37 ; 6499.98,4565.06 6499.98,4589.86 6499.98,4690.98 6555,4746 6825,4746 6910.2,4660.8 KEY7.1@6910.2,4603.66 ; KEY6.1@6505.98,4559.06 6505.98,4433.98 6365.37,4293.37 6150.37,4293.37 ; 6897.5,4646.36 6900,4646.36 6900.59,4645.77 ; KEY7.1@6910.2,4601.06 KEY7.1@6911.5,4602.36 ; 5308,4274 5523,4274 5563.74,4314.74 KEY2.1@5563.74,4396.34 ; KEY2.1@5563.74,4396.34 KEY2.1@5565.04,4397.64
KO_1: KEY8.1 KEY9.1 KEY10.1 KEY11.1 KEY12.1 KEY13.1 KEY14.1 U1.98 | length 8531.7
  Top Layer w7: v1(5021,1964) 5021,2215 5066,2260 5066,2778 v1@5243,2955 ; v1(5144.5,1715.2) 5355.8,1715.2 v1(5369,1702) ; v1(5229,3063) 5218,3074 5218,3281 5242,3305 v1(5282,3305) ; v1(5235,4740) 5235,4742 5266,4711 v1(5266,4707) ; v1(5241,4308) 5276,4343 5276,4409 v1(5274,4411) ; v1(5244,2955) v1@5243,2955 ; v1(5270,3867) 5270,3818 v1(5272,3816) ; v1(5278,3558) 5276,3556 5276,3498 v1(5280,3494) ; U1.98@5402.32,2687.29 5401.18,2687.29 5317.03,2771.44 5317.03,2795.97 5243,2870 v1@5243,2955 ; v1(6362,4330) 6367,4325 v1(6367,4268.89)
  Bottom Layer w7: 4814,4050 4815,4049.47 ; KEY8.1@4821,4080 4821,4148 4861.8,4188.8 4959.79,4188.8 4985.99,4215 5081.33,4215 5141.21,4155.12 ; v1(5021,1964) 5058,1927 5058,1801.7 v1(5144.5,1715.2) ; 5173.87,4085.13 KEY9.1@5175.28,4083.72 ; KEY9.1@5175.28,4080 KEY9.1@5175.28,4083.72 ; v1(5229,3063) 5244,3048 v1(5244,2955) ; v1(5235,4740) 5235,4732 5272,4769 5994.38,4769 6362,4401.38 v1(6362,4330) ; v1(5241,4308) 5175.28,4242.28 KEY9.1@5175.28,4083.72 ; v1(5266,4707) 5266,4419 v1(5274,4411) ; v1(5270,3867) 5270,3989 KEY9.1@5175.28,4083.72 ; v1(5272,3816) 5272,3559 5273,3558 v1(5278,3558) ; v1(5280,3494) 5280,3307 v1(5282,3305) ; v1(5369,1702) 5442,1775 5884,1775 ; 5843.04,1628 5843.04,1734.04 5884,1775 ; KEY12.1@5843.21,1623.29 KEY12.1@5844.5,1622 ; v1(6367,4268.89) 6369.11,4271 6465.83,4174.28 6515.61,4124.51 6515.61,4124 ; KEY13.1@6387.9,1622 6387.9,1728.9 6434,1775 ; 6898.46,4160.67 6916.14,4142.99 ; KEY14.1@6902.31,1623.29 KEY14.1@6903.6,1622 6903.6,1710.4 6839,1775 6434,1775 ; 5884,1775 6434,1775
  Bottom Layer w10: KEY10.1@6529.61,4080 6638.41,4188.8 6648.77,4188.8 6667.97,4208 6843.87,4208 6879.47,4172.4 6927.87,4124
KO_2: KEY15.1 KEY16.1 KEY17.1 KEY18.1 KEY19.1 KEY20.1 KEY21.1 U1.1 | length 7641.3
  Top Layer w7: v1(5244,3489) 5244,3552 v1(5246,3554) ; v1(5253,3086) 5253,3268 v1(5257,3272) ; v1@5268,2887 v1@5268,2976 ; U1.1@5374.48,2574.55 5377.55,2574.55 5474,2671 v1(5474,2681)
  Bottom Layer w7: 4815,3723 4819.21,3727.21 4922.54,3830.54 4945.12,3830.54 4958.58,3844 5174,3844 ; 5036,3723 5200,3723 ; 5049,3687 5194.5,3687 ; 5053,3761 5206,3761 ; 5072,3652 5191,3652 ; 5208.82,3761 5208.82,3809.18 5174,3844 ; KEY16.1@5218,3719 5218.71,3718.29 KEY16.1@5220,3717 ; 5218.54,3723 5246,3695.54 v1(5246,3554) ; v1(5244,3489) 5257,3476 v1(5257,3272) ; v1(5253,3086) 5273,3066 v1(5273,2976) ; v1@5266,2887 v1(5267,2887) 5268,2887 v1(5474,2681) ; 5452,3723 5629,3723 ; 5465,3687 5612.5,3687 ; 5469,3761 5622,3761 ; 5488,3652 5587,3652 ; 5625,3761 5624.82,3761 ; 5627.05,3755.95 5622,3761 ; 5630,3723 5632.27,3720.73 5634.71,3718.29 KEY17.1@5636,3717 ; 6061.82,3761 6061.82,3791.18 6009,3844 ; 6487,3750.82 6487,3788 6431,3844 ; 6888.11,3790.05 6888.11,3794.89 6839,3844 6647.56,3844 6634.09,3830.54 6578.51,3830.54 6565.04,3844 6431,3844 ; KEY21.1@6903.6,1210 6938,1210 6958,1230 6958,3683.54 6918.54,3723 ; 5174,3844 5571,3844 ; 5571,3844 5624.82,3790.18 5624.82,3761 ; 5571,3844 6009,3844 ; 5622,3761 5624.82,3761 ; 6009,3844 6431,3844
KO_3: KEY22.1 KEY23.1 KEY24.1 KEY25.1 KEY26.1 KEY27.1 KEY28.1 U1.2 | length 6486.4
  Top Layer w7: v1(5289,3110) 5289,3163 v1@5297.5,3171.5 ; v1(5299,2905) v1@5299,3001 ; U1.2@5388.4,2560.63 5514,2686.23 5513.77,2686.23 v1(5510,2690) ; v1(5580,2510) 5586,2510 5626,2470 v1(5626,2467) ; v1(5996,2240) 5996,2236 v1(6050,2182) ; v1(6130,1622) 6130,1585 v1(6164,1551) ; v1(6130,1751) v1(6130,1799) ; v1(6311,1399) 6312,1399 6369,1342 v1(6369,1324)
  Bottom Layer w7: KEY22.1@4821,3350 4821,3443 4902.8,3524.8 5118,3524.8 ; v1(5289,3110) 5302,3097 v1@5302,3001 ; v1(5291,3178) 5291,3195 5220,3266 KEY23.1@5220,3350 5220,3422.8 5118,3524.8 ; v1@5297,2903 v1(5510,2690) 5535,2690 5588,2637 5588,2510 v1(5580,2510) ; v1(5626,2467) 5629,2470 5635,2470 5696.7,2408.3 5698.24,2408.3 5711.3,2395.24 5711.3,2336.7 5726.7,2321.3 5726.7,2320.77 5808.47,2239 5996,2239 v1(5996,2240) ; KEY24.1@5634.71,3351.29 5634.8,3351.38 5634.8,3427 5537,3524.8 ; v1(6050,2182) 6050,1879 v1(6130,1799) ; KEY25.1@6071.71,3349.99 6071.71,3350.42 6071.71,3426.08 5973,3524.8 ; v1(6130,1622) v1(6130,1751) ; v1(6164,1551) 6162,1551 6161,1550 6312,1399 v1(6311,1399) ; 6203.9,1207 6362.5,1207 ; 6220.9,1245 6373.9,1245 ; v1(6369,1324) 6387.9,1305.1 KEY28.1@6387.9,1201 ; KEY26.1@6494,3350 6551,3407 6551,3449 ; 6749,3320 6900,3320 ; 6878.77,3431.16 6820.94,3489 6734,3489 6694,3449 6551,3449 ; 6878.78,3431.16 6897.57,3412.37 ; 5118,3524.8 5537,3524.8 ; 5537,3524.8 5973,3524.8 ; 5973,3524.8 6475.2,3524.8 6551,3449
  other v1: 5304,2999
KO_4: KEY29.1 KEY30.1 KEY31.1 KEY32.1 KEY33.1 KEY34.1 KEY35.1 U1.3 | length 5741.1
  Top Layer w7: v1(5102,2139) 5139.19,2176.19 5139.19,2369.19 5292,2522 5377.61,2522 U1.3@5402.32,2546.71 5539,2683.39 5539,2711 v1(5531,2719) ; v1(5521,1491) 5637,1491 v1(5804,1324)
  Bottom Layer w7: 4814,2942 4815,2941.47 ; KEY29.1@4821,2972 4821,3089 4885,3153 5270,3153 ; v1(5102,2139) 5103,2138 5103,1916.3 5521,1498.3 v1(5521,1491) ; KEY30.1@5218.71,2973.29 5206,2973.29 5206,2978 5206,3016 5206,3021.49 5206,3089 5270,3153 ; KEY30.1@5220,2972 5220,2947 5220.47,2947 5234.77,2932.7 5253.24,2932.7 5267.53,2947 5328.09,2947 5531,2744.09 v1(5531,2719) ; KEY31.1@5636,2972 5636,3036 5753,3153 ; v1(5804,1324) 5844.5,1283.5 KEY35.1@5844.5,1201 ; KEY32.1@6071.71,2973.29 6071.71,3071.29 ; KEY33.1@6492.7,2970.7 KEY33.1@6494,2972 ; KEY33.1@6492.71,2972 KEY33.1@6494,2972 ; KEY33.1@6492.71,2973.29 KEY33.1@6494,2972 ; KEY34.1@6918.71,2973.29 6918.71,3071.29 6851.22,3138.78 6558.17,3138.78 6555.35,3135.97 6499.77,3135.97 ; 5270,3153 5753,3153 ; 5753,3153 5990,3153 6071.71,3071.29 ; 6071.71,3071.29 6084.29,3071.29 6159,3146 6489.73,3146 6499.77,3135.97 ; KEY33.1@6494,2972 6499.77,2977.77 6499.77,3135.97
KO_5: KEY36.1 KEY37.1 KEY38.1 KEY39.1 KEY40.1 KEY41.1 KEY42.1 U1.4 | length 4394.5
  Top Layer w7: v1(5072,2174) 5072,2240 v1@5099,2267 ; v1(5333,2498) 5381.45,2498 U1.4@5416.24,2532.79 5539.45,2656 v1(5634,2656) ; v1(5479,1490) 5480,1489 v1(5480,1319)
  Bottom Layer w7: KEY36.1@4832.7,2535.4 4832.7,2643.7 4900,2711 5231,2711 5331.41,2610.59 5331.41,2535.82 KEY37.1@5331.41,2535.68 ; v1(5072,2174) 5072,1895.12 5243.88,1723.24 ; v1@5099,2264 v1(5099,2275) 5099,2394 5122.97,2417.97 5221.44,2417.97 5237.49,2434.02 5240.74,2434.02 ; 5331.24,1628 5341,1628 v1(5479,1490) ; KEY42.1@5332.7,1201 5450.7,1319 v1(5480,1319) ; v1(5634,2656) 5640,2662 5766,2662 5844.5,2583.5 KEY38.1@5844.5,2535.4 ; KEY38.1@5843.21,2536.69 KEY38.1@5844.5,2535.4 ; KEY40.1@6903.6,2535.4 6903.6,2575.4 6880.96,2598.04 6862.65,2616.35 6815,2664 6581,2664 6464.3,2547.3 6410.77,2547.3 6393.61,2530.14 6386.47,2530.14 6386.47,2401.47 6243,2258 6181,2258 5903.6,2535.4 KEY38.1@5844.5,2535.4
KO_6: KEY43.1 KEY44.1 KEY45.1 KEY46.1 KEY47.1 KEY48.1 KEY49.1 U1.5 | length 5840.4
  Top Layer w7: v1(4662.17,1456.3) 4662.17,1414.83 v1(4684,1393) ; v1(4821,1932) 4826,1937 v1(4826,1983) ; v1(5102,1550) 5104,1548 v1(5104,1505) ; v1@5376.64,2465.36 U1.5@5430.16,2518.87 ; v1(5423,2196) v1(5423,2298)
  Bottom Layer w7: 4648.7,2088.7 4810.3,2088.7 ; 4661.7,1592 4812.5,1592 ; v1(4662.17,1456.3) 4719.3,1456.3 4733,1470 4857.38,1470 4892.38,1505 v1(5104,1505) ; 4665.7,2126.7 4784.7,2126.7 4816.8,2126.7 4824.98,2118.52 4826.7,2116.8 ; v1(4684,1393) 4737,1393 4831.35,1298.65 KEY49.1@4831.35,1204.65 ; 4684.7,1557 4725,1557 4741,1541 4741,1520.65 ; 4740.75,1520.62 4741,1520.62 ; 4818.7,2126.7 4823.75,2121.65 4826.7,2118.7 4826.7,2116.8 ; v1(4821,1932) 4821,1667.07 4821,1632.41 4825.41,1628 KEY48.1@4831.41,1622 ; v1(4826,1983) 4832.7,1989.7 KEY43.1@4832.7,2082.7 ; 4826.7,2113.51 4826.7,2116.8 ; KEY43.1@4831.37,2085.64 4831.37,2186.37 4852,2207 5406,2207 ; KEY48.1@4832.7,1622 4832.7,1554.3 4842,1545 5097,1545 v1(5102,1550) ; 5148.7,2088.7 5321,2088.7 ; 5165.7,2126.7 5307.8,2126.7 ; 5331.24,2088.7 5332.54,2090 ; KEY44.1@5331.41,2083.99 KEY44.1@5332.7,2082.7 5332.7,2133.7 5406,2207 ; v1(5376,2466) 5449,2393 5447.53,2393 5510.3,2330.24 5510.3,2311.76 5497.23,2298.7 5422.7,2298.7 5422.7,2298.3 v1(5423,2298) ; 5844,2076 5844,2100.81 5844,2151 5900,2207 ; KEY46.1@6387.9,2082.7 6387.9,2147.9 6454,2214 ; KEY47.1@6903.6,2082.7 6903.6,2190.6 6880.2,2214 6454,2214 ; 5406,2207 5900,2207 ; 5900,2207 6276.63,2207 6283.63,2214 6454,2214
  Bottom Layer w10: 4831,1191.97 4831,1210.31
LCD_RST: LCD.27 U1.18 | length 2334.4
  Top Layer w7: LCD.27@5342.52,4450 LCD.27@5342.52,4496.06 ; LCD.27@5349.1,4483 5349.1,4036.9 5454.3,3931.7 5454.3,2870.7 v1(5463,2862) ; U1.18@5611.11,2337.91 5653,2379.8 v1(5653,2392)
  Bottom Layer w7: v1(5463,2862) 5603,2722 5603,2442 v1(5653,2392)
NetC12_1: C12.1 U1.49 | length 225.6
  Top Layer w10: U1.49@6113.6,2560.63 6207.23,2467 C12.1@6300.44,2467
NetC13_1: C13.1 U1.73 | length 179.7
  Top Layer w7: U1.73@5821.29,2965.68 5869,3013.39 5869,3082.56 C13.1@5838.56,3113
NetC400_2: C400.2 LCD.3 | length 235.2
  Top Layer w7: LCD.3@6098.43,4496.06 6098.43,4483 6098.43,4427 6214.4,4311.02 C400.2@6216.54,4311.02
NetC401_2: C401.2 LCD.4 | length 224.2
  Top Layer w7: LCD.4@6066.93,4496.06 6066.93,4483 6066.93,4422 6161.42,4327.51 C401.2@6161.42,4311.02
NetC402_2: C402.2 LCD.5 | length 214.4
  Top Layer w7: LCD.5@6035.43,4496.06 6035.43,4483 6035.43,4417 6106.3,4346.13 C402.2@6106.3,4311.02
NetC403_2: C403.2 LCD.6 | length 204.6
  Top Layer w7: LCD.6@6003.94,4496.06 6003.94,4483 6003.94,4424 6051.18,4376.76 C403.2@6051.18,4311.02
NetC404_2: C404.2 LCD.7 | length 194.8
  Top Layer w7: LCD.7@5972.44,4496.06 5972.44,4483 5972.44,4414.62 5996.06,4391 C404.2@5996.06,4311.02
NetC405_1: C405.1 LCD.9 | length 278.8
  Top Layer w7: LCD.9@5909.45,4496.06 5909.45,4483 5909.45,4429.45 5900,4420 5900,4266.45 5910.54,4255.91 C405.1@5940.94,4255.91
NetC405_2: C405.2 LCD.8 | length 185
  Top Layer w7: C405.2@5940.94,4311.02 5940.94,4483 LCD.8@5940.94,4496.06
NetC406_1: C406.1 LCD.11 | length 280.6
  Top Layer w7: LCD.11@5846.46,4496.06 5846.46,4483 5846.46,4426.46 5830,4410 5830,4266.91 5841,4255.91 C406.1@5870.08,4255.91
NetC406_2: C406.2 LCD.10 | length 188.3
  Top Layer w7: C406.2@5870.08,4311.02 5870.08,4399 5877.95,4406.87 5877.95,4483 LCD.10@5877.95,4496.06
NetC407_2: C407.2 LCD.12 LCD.13 | length 298.3
  Top Layer w7: C407.2@5779.53,4255.91 5800,4255.91 5814.96,4270.87 5814.96,4483 5814.96,4496.06 5790.05,4496.06 LCD.13@5783.46,4496.06
NetC410_2: C410.2 LCD2.30 R402.1 | length 123.1
  Top Layer w7: C410.2@4120,4467.56 v1(4120,4493) R402.1@4120,4520.47
  Bottom Layer w7: v1(4120,4493) 4120.39,4493.39 LCD2.30@4190,4493.39
NetCON200_2: CON200.2 R200.2 | length 285.5
  Top Layer w7: R200.2@6579.53,3290 6654.62,3290 6776.21,3168.41 CON200.2@6814.68,3168.41
NetCON200_3: CON200.3 R201.2 | length 295.6
  Top Layer w7: R201.2@6579.53,3340 6623,3340 6769,3194 CON200.3@6814.68,3194
NetCON200_4: CON200.4 R202.2 | length 309.7
  Top Layer w7: R202.2@6579.53,3386 6579.53,3390 6606,3390 6776.41,3219.59 CON200.4@6814.68,3219.59
NetCON200_8: CON200.8 CON200.9 L200.1 | length 614
  Top Layer w10: L200.1@6663,2899 6768.7,2899 CON200.8@6908.19,3038.49 CON200.9@6908.19,3349.51
NetQ400_2: Q400.2 R400.1 R401.1 | length 242.4
  Top Layer w7: Q400.2@4125.71,4642.6 4157.4,4642.6 4180,4620 4180,4579.53 4190.47,4579.53 4200,4570 4200,4480 4189.53,4469.53 R401.1@4180,4469.53
NetR102_1: R102.1 U100.4 U100.8 | length 654
  Top Layer w15: U100.4@4810,1540 4885,1540 4922,1577 4922,1654 4958,1690 U100.8@5030,1690 5130.47,1690 R102.1@5290.47,1530
NetR103_2: R103.2 U100.2 | length 130.9
  Top Layer w10: R103.2@4700,1589.53 4735.53,1589.53 4786,1640 U100.2@4810,1640
OSC32_IN: C17.1 U1.8 X3.4 | length 989
  Top Layer w7: X3.4@5327.01,1811.73 5327.01,1890.55 C17.1@5230,1987.56 5230,2105 5152.19,2182.81 5152.19,2360.19 5186,2394 5388.8,2394 U1.8@5471.91,2477.11
OSC32_OUT: C18.1 U1.9 X3.1 | length 1322.4
  Top Layer w7: C18.1@5230,1822.44 5301.44,1751 5392.26,1751 X3.1@5452.99,1811.73 5361.72,1903 5332.94,1903 5260,1975.94 5260,2093.38 5165.19,2188.19 5165.19,2354.81 5189.38,2379 5401.64,2379 U1.9@5485.84,2463.19
OSC_IN: C15.1 U1.12 X1.2 | length 624
  Top Layer w7: U1.12@5527.59,2421.43 5449,2342.84 5449,2114.62 5475.62,2088 5526,2088 5559.44,2054.56 C15.1@5559.44,2044 5559.44,1965.88 X1.2@5602.32,1923
OSC_OUT: C16.1 U1.13 X1.1 | length 771.4
  Top Layer w7: U1.13@5541.51,2407.51 5462,2328 5462,2120 5481,2101 5698.44,2101 C16.1@5751.44,2048 5767.68,2031.76 X1.1@5767.68,1923
PH_ENABLE: U1.17 U101.3 | length 1373.7
  Top Layer w7: U101.3@4600,1785.2 4623.2,1785.2 4649,1811 4649,1978 4797,2126 v1(4797,2201) ; v1(5485,2240) 5485.36,2240 U1.17@5597.19,2351.84
  Bottom Layer w7: v1(4797,2201) 4817,2221 5465,2221 5484,2240 v1(5485,2240)
RST: C14.2 R1.1 U1.14 | length 347.3
  Top Layer w7: C14.2@5288.56,2247 R1.1@5331.47,2247 v1@5331.47,2268.47 ; v1(5488,2321) 5488,2326.16 U1.14@5555.43,2393.59
  Bottom Layer w7: v1@5331.47,2268.47 5389,2326 5483,2326 v1(5488,2321)
  other v1: 5335,2276
SD-DET#: CON300.9
SDIO_CK: CON300.5 U1.80 | length 1261.3
  Top Layer w7: U1.80@5652.87,2937.84 5707.7,2883.01 5707.7,2882.76 5720.77,2869.7 5721.01,2869.7 5744,2846.71 5744,2800 v1(5743,2799) ; 6237,2308 6239,2308 6326,2221 6326,2079 6363.65,2041.35 CON300.5@6430.18,2041.35
  Bottom Layer w7: v1(5743,2799) 5746,2799 v1(6227,2318) 6237,2308
SDIO_CMD: CON300.3 R301.1 U1.83 | length 1754.1
  Top Layer w7: U1.83@5611.11,2896.09 5686.2,2821 v1(5713,2821) ; v1(6269,2320) 6273,2320 6349,2244 6349,2159 6380.03,2127.97 CON300.3@6430.18,2127.97 6538.03,2127.97 6609,2057 R301.1@6609,1698.53
  Bottom Layer w7: v1@5713,2822 5755,2822 6257,2320 v1(6269,2320)
SDIO_D0: CON300.8 R304.1 U1.65 | length 1538.3
  Top Layer w7: v1(5817,2660) 5841,2684 5841,2762.68 U1.65@5932.65,2854.33 ; v1@6191.5,2284.5 6280,2196 6280,2012 6380.57,1911.43 CON300.8@6430.18,1911.43 6475.57,1911.43 6489,1898 R304.1@6489,1698.53
  Bottom Layer w7: v1(5817,2660) 5817,2657 v1@6190.5,2283.5
  other v1: 6190,2283
SDIO_D1: CON300.7 R300.1 U1.66 | length 1624.4
  Top Layer w7: v1(5812.47,2696.47) 5812.47,2761.99 U1.66@5918.73,2868.25 ; v1@6230,2285 6303,2212 6303,2042 6390.26,1954.74 CON300.7@6430.18,1954.74 6501.26,1954.74 6549,1907 R300.1@6549,1698.53 6564.3,1698.53 6564.3,1714.8
  Bottom Layer w7: v1(5812.47,2696.47) 5812.47,2701 6227.77,2285.7 v1@6229.3,2285.7
  other v1: 6227,2282
SDIO_D2: CON300.1 R303.1 U1.78 | length 1816.5
  Top Layer w7: U1.78@5680.71,2965.68 5722.39,2924 v1(5726,2924) ; v1(6306,2360) 6430.18,2235.82 CON300.1@6430.18,2214.58 6581.42,2214.58 6729,2067 R303.1@6729,1698.53 R303.1@6714,1698.53
  Bottom Layer w7: v1(5726,2924) 5730.83,2924 6294.83,2360 v1(6306,2360)
SDIO_D3: CON300.2 R302.1 U1.79 | length 1790.3
  Top Layer w7: U1.79@5666.79,2951.76 5666.79,2951.68 5726.47,2892 v1(5730,2892) ; v1(6268,2354) 6272.38,2354 6374,2252.38 6374,2185 6387.72,2171.28 CON300.2@6430.18,2171.28 6560.72,2171.28 6669,2063 R302.1@6669,1698.53 R302.1@6655,1698.53
  Bottom Layer w7: v1(5730,2892) 5730,2893 5730.5,2892.5 6268,2355 v1(6268,2354)
SPI2_MISO: U1.53 U500.2 | length 648.3
  Top Layer w7: U1.53@6099.68,2687.29 6188.39,2776 6565,2776 6636,2705 U500.2@6681.85,2705
SPI2_MOSI: U1.54 U500.5 | length 442.2
  Top Layer w7: U1.54@6085.76,2701.21 6189.55,2805 U500.5@6485,2805
SPI2_NSS: R500.1 U1.51 U500.1 | length 711
  Top Layer w7: U1.51@6127.52,2659.45 6196.07,2728 6561,2728 6634,2655 U500.1@6681.85,2655 6752.32,2655 R500.1@6771.85,2635.47
SPI2_SCK: U1.52 U500.6 | length 405.2
  Top Layer w7: U1.52@6113.6,2673.37 6195.23,2755 U500.6@6485,2755
SPI3_MISO: U1.90
SPI3_MOSI: U1.91
SPI3_SCK: U1.89
STDBY: U1.43 U100.6 | length 4059.7
  Top Layer w7: U100.6@5030,1590 5175,1590 5206,1559 5206,1461 5267,1400 5362,1400 5456.7,1494.7 5456.7,1499.23 5471.47,1514 5668,1514 5862,1320 6100,1320 6284,1504 v1(6284,1842) ; U1.43@6030.09,2477.11 6011,2496.2 6011,2587 6054,2630 v1(6062,2630) ; v1@6456,2586.38 6456,2555 6889,2122 v1(6889,1875)
  Bottom Layer w7: v1(6062,2630) 6086,2654 6332,2654 6379,2607 6449,2607 v1(6458,2598) ; v1(6284,1842) 6856,1842 v1(6889,1875)
SWCLK: P1.3 U1.76 | length 1465.7
  Top Layer w7: P1.3@4580,2530 4667,2617 4860,2617 v1@5356,3113 ; v1(5624,3126) 5662,3088 5662,3040.07 U1.76@5708.55,2993.52
  Bottom Layer w7: v1(5359,3110) 5378,3129 5500,3129 5508,3137 5609,3137 5620,3126 v1(5624,3126)
SWDIO: P1.2 U1.72 | length 1775.7
  Top Layer w7: P1.2@4580,2630 4844,2630 5337,3123 5337,3158 v1@5356,3177 ; v1(5693,3177) 5830,3177 5896,3111 5896,3012.55 U1.72@5835.21,2951.76
  Bottom Layer w7: v1@5356,3175 5632,3175 5634,3177 v1(5693,3177)
  other v1: 5356,3178
TFT_BL: PLEDB.2 U1.93 | length 1809.3
  Top Layer w7: PLEDB.2@4671.3,4169.37 PLEDB.2@4720,4169.37 4782.63,4169.37 4850,4102 4850,3812 5381.7,3280.3 5381.7,2847.1 U1.93@5471.91,2756.89
TFT_EN: PLEDC.1 U400.3 | length 303.2
  Top Layer w7: U400.3@4220,4334.8 4245.2,4334.8 4257,4323 4257,4155 4282,4130 PLEDC.1@4340,4130
TFT_ENABLE: PLEDB.1 U1.92 | length 1751.7
  Top Layer w7: PLEDB.1@4720,4130 4784,4130 4827,4087 v1(4827,3823) ; v1(4873,3821) 4866.62,3821 4863,3817.38 5394.7,3285.68 5394.7,2861.94 U1.92@5485.84,2770.81
  Bottom Layer w7: v1(4827,3823) 4829,3821 v1(4873,3821)
TFT_PWM: PLEDC.2 R401.2 | length 372.4
  Top Layer w7: R401.2@4170,4410.47 4180.47,4400 4230,4400 4270,4360 4270,4185 4285.63,4169.37 PLEDC.2@4340,4169.37
TVCC: BAT.1 C101.2 P1.4 PLEDB.15 PLEDC.15 R105.2 U100.5 U101.1 U102.1 U102.3 U400.1 | length 6677.4
  Top Layer w7: U400.1@4220,4261 U400.1@4220,4260 4220,4160 4300,4080 4300,3996 v1(4471,3825) ; PLEDC.15@4340,4681.18 v1(4417,4681.18) 4418.82,4681.18 4486.66,4749.03 4578.97,4749.03 v1(4585,4743) ; P1.4@4580,2430 P1.4@4590,2420 ; U102.1@4600,1720 4575,1720 4555,1700 ; U101.1@4600,1860 4582,1860 4555,1833 ; C101.2@4910,2327.56 4855.56,2382 4628,2382 P1.4@4590,2420 ; U100.5@5030,1540 4951,1540 4887,1476 4674,1476 4600,1550 U102.3@4600,1645.2 4568.8,1645.2 4555,1659 4555,1700 ; 4555,1700 4555,1833 ; 4555,1833 4555,2166 4578.53,2189.53 R105.2@4600,2189.53 4590,2199.53 BAT.1@4590,2300 P1.4@4590,2420
  Top Layer w10: v1(4556,2835) 4556,2834 4870,2834 v1(4933,2771) ; v1(4585,4743) 4646.82,4681.18 PLEDB.15@4720,4681.18 ; C101.2@4910,2327.56 4910,2612 v1(5036,2738)
  Bottom Layer w7: v1(4417,4681.18) 4417,4296 4477,4236 4477,3827 4475,3825 v1(4471,3825)
  Bottom Layer w10: v1(4556,2835) 4555.2,2835.8 4555.2,3557.86 4564.5,3567.15 4564.5,4722.5 v1(4585,4743) ; v1(4933,2771) 5003,2771 v1(5036,2738)
USB_DM: D200.4 R200.1 U1.71 | length 1161.9
  Top Layer w7: U1.71@5849.13,2937.84 v1(6082.29,3171) ; v1(6353,3184) 6459,3290 R200.1@6520.47,3290 ; R200.1@6520.47,3299.14 R200.1@6520.47,3304 ; R200.1@6526.47,3304 6526.47,3298.14 6613,3211.62 6613,3060 6633.8,3039.2 D200.4@6664.42,3039.2
  Bottom Layer w7: v1(6082.29,3171) 6340,3171 v1(6353,3184)
USB_DP: D200.6 R201.1 U1.70 | length 1145.9
  Top Layer w7: U1.70@5863.05,2923.92 6087.83,3148.7 6099.64,3148.7 6131.73,3180.8 6131.73,3198.27 v1(6127.41,3198.27) ; v1(6353,3217) 6358,3212 6362.62,3212 6490.62,3340 6544,3340 6557,3327 6557,3286 6664.42,3178.58 D200.6@6664.42,3123
  Bottom Layer w7: v1(6127.41,3198.27) 6130.68,3195 6331,3195 v1(6353,3217)
USB_ID: R202.1 U1.69 | length 952.7
  Top Layer w7: U1.69@5876.97,2910 5881,2910 v1(6087,3116) ; v1(6321,3218) 6320,3218 6320.5,3218.5 6488,3386 6516.47,3386 6520.47,3390 6520.47,3400 R202.1@6520.47,3405.49
  Bottom Layer w7: v1(6087,3116) 6051,3152 6051,3184 6087.56,3220.56 6136.64,3220.56 6139.21,3218 v1(6321,3218)
VBL: LCD2.32 Q400.1 | length 202.7
  Top Layer w10: Q400.1@4125.71,4717.4 4223,4620.11 v1(4223,4555)
VBUS: C100.2 CON200.1 D200.5 R102.2 | length 3718.2
  Top Layer w7: v1(5344,1442) 5347.56,1445.56 C100.2@5347.56,1470 5347.56,1528.03 R102.2@5349.53,1530 ; v1(5859,1427) 5941,1427 v1(5946,1422) ; D200.5@6664.42,3076.6 6667,3076.6 6667,3076 6674.02,3076 6708,3076 6774.82,3142.82 CON200.1@6814.68,3142.82 6860.7,3142.82 v1(6869.7,3151.83) ; v1(6764,1470) 6807,1470 v1(6812,1475)
  Bottom Layer w7: v1(5344,1442) v1@5344,1446 ; v1@5344,1448 v1@5344,1446 ; v1(5859,1427) 5363,1427 v1@5344,1446 ; v1(5946,1422) 5951,1422 6008,1365 6339,1365 6472.67,1498.67 6554.73,1498.67 6583.41,1470 v1(6764,1470) ; v1(6812,1475) 6843,1475 6945,1577 6945,3132 6930.47,3146.53 6875,3146.53 v1(6869.7,3151.83)
VDD: C8.1 C9.1 C10.1 C11.1 C19.1 C500.1 KON.1 LCD.1 LCD.15 R1.2 R6.2 R500.2 U1.6 U1.11 U1.19 U1.21 U1.22 U1.28 U1.50 U1.75 U1.100 U102.5 U500.3 U500.7 U500.8 | length 11833.2
  Top Layer w7: U102.5@4698.43,1720 4698.43,1681.07 4712.5,1667 4909,1667 4979.5,1737.5 5476.5,1737.5 5489,1750 5489,1967 5482.73,1973.27 5291.73,1973.27 5283,1982 5283,2183 5259,2207 5259,2272.56 5245.56,2286 C19.1@5245.56,2310 5251.56,2316 5388.32,2316 5388.32,2249.21 R1.2@5390.53,2247 ; R6.2@5100,2649.53 5090,2649.53 5093.47,2653 5175,2653 5190.44,2668.44 C10.1@5190.44,2811 5229.44,2772 5261.93,2772 U1.100@5374.48,2659.45 5376.6,2659.45 5384,2652.05 v1(5384,2617) ; 5388.66,2311.34 U1.11@5512.67,2435.35 ; R1.2@5398,2247 R1.2@5390.53,2247 ; v1(5420,2117) 5414.3,2122.7 5414.3,2173.17 5390.53,2196.94 R1.2@5390.53,2247 ; U1.6@5444.08,2504.95 5538,2598.87 v1(5538,2617) 5557.7,2597.3 ; U1.11@5513.67,2435.35 5557.7,2479.38 5557.7,2597.3 ; v1(5542.98,2123.3) 5547.3,2123.3 5563.56,2139.56 C11.1@5563.56,2141 5563.56,2206.85 5714.71,2358 ; U1.19@5625.03,2324 5659.03,2358 5714.71,2358 ; U1.22@5666.79,2282.24 U1.21@5652.87,2296.16 U1.21@5671.47,2314.76 ; U1.75@5793.45,2993.52 5768,2968.07 5768,2627 5684,2543 5612,2543 5557.7,2597.3 ; C8.1@5924.44,2138 5879,2183.44 5879,2210.61 5787,2302.61 5787,2337.5 5766.5,2358 5714.71,2358 ; v1(5980,2302) 5993.62,2302 6130.62,2439 6313,2439 6329,2455 6329,2497.44 C9.1@6300.44,2526 ; U1.50@6127.52,2574.55 6176.07,2526 C9.1@6300.44,2526 ; LCD.1@6168,4483 6168,4567 6123,4612 5771,4612 5727.05,4568.05 LCD.15@5727.05,4483 5727.05,4423.95 v1(5728,4423) 5728,4307.41 5715.5,4294.91 5715.5,4150.5 6083.7,3782.3 6238.23,3782.3 6450.99,3569.54 6780.33,3569.54 6957.06,3392.82 6957.06,2945.3 6771.85,2760.1 C500.1@6771.85,2757.44 ; U500.7@6485,2705 U500.7@6485,2704 ; R500.2@6771.85,2694.53 C500.1@6771.85,2755 ; C9.1@6300.44,2526 6300.44,2584.44 6420,2704 U500.7@6485,2704 ; U500.7@6485,2704 U500.8@6485,2655 6545,2595 6782.5,2595 6816,2628.5 6816,2726.5 6787.5,2755 C500.1@6771.85,2755 ; C500.1@6771.85,2755 U500.3@6681.85,2755 6684.29,2757.44 C500.1@6771.85,2757.44 ; C500.1@6771.85,2755 C500.1@6771.85,2757.44
  Bottom Layer w7: 4637,4612.3 4809,4612.3 ; 4650,4576.3 4795,4576.3 ; 4654,4650.3 4797.2,4650.3 ; 4673,4541.3 4709.74,4541.3 4745.3,4541.3 ; 4729,4504.92 4729,4525 4745.3,4541.3 ; 4792,4541.3 4745.3,4541.3 ; 4795.69,4544.99 4748,4544 4745.3,4541.3 ; KON.1@4819.71,4607.59 4822.29,4607.59 4932.4,4717.7 5244.24,4717.7 5256.53,4730 5421,4730 v1(5728,4423) ; v1(5384,2617) v1(5538,2617) ; v1(5420,2117) 5423,2120 5489.47,2120 5490.77,2118.7 5540.7,2118.7 5542.98,2120.98 v1(5542.98,2123.3) ; v1(5784,2320) 5785,2320 5803,2302 v1(5980,2302)
VPH: CON300.4 R300.2 R301.2 R302.2 R303.2 R304.2 U101.5 | length 3942.7
  Top Layer w7: U101.5@4698.43,1860 4745,1860 4760,1875 v1(4760,1901) ; v1@5606,1388 5700,1294 6592.5,1294 6637,1338.5 6637,1639.47 ; CON300.4@6430.18,2084.66 6486,2084.66 v1(6530.66,2040) ; R304.2@6489,1639.47 R300.2@6549,1639.47 R301.2@6601.47,1639.47 ; v1(6637,2040) 6637,1675 ; R303.2@6729,1639.47 R302.2@6669,1639.47 6637,1639.47 ; R301.2@6601.47,1639.47 R301.2@6609,1639.47 6637,1639.47 ; R301.2@6601.47,1639.47 6637,1675 ; 6637,1639.47 6637,1675
  Bottom Layer w7: v1(4760,1901) 4613,1754 4613,1457 4636,1434 4902.36,1434 4968.89,1367.47 5585.47,1367.47 v1@5606,1388 ; v1(6530.66,2040) v1(6637,2040)
  other v1: 5605,1379